# EAGLE board Keyboard_Scanner_LT2 (EAGLE 9.5.0)
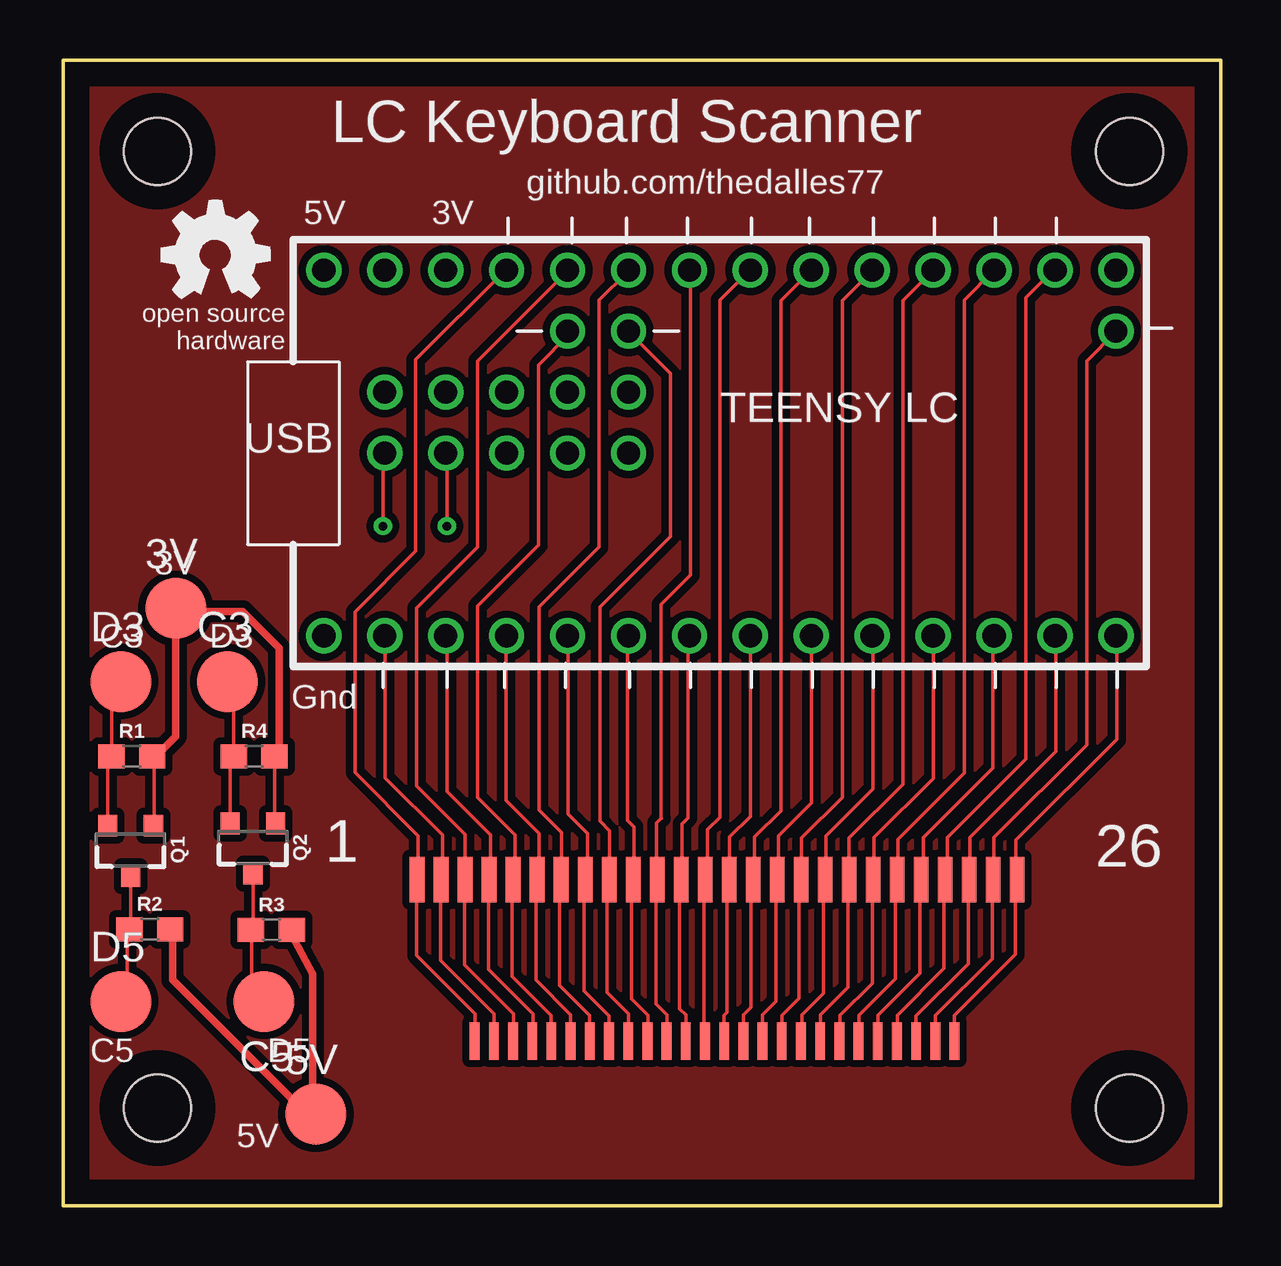
[diagram p0: board, top side]
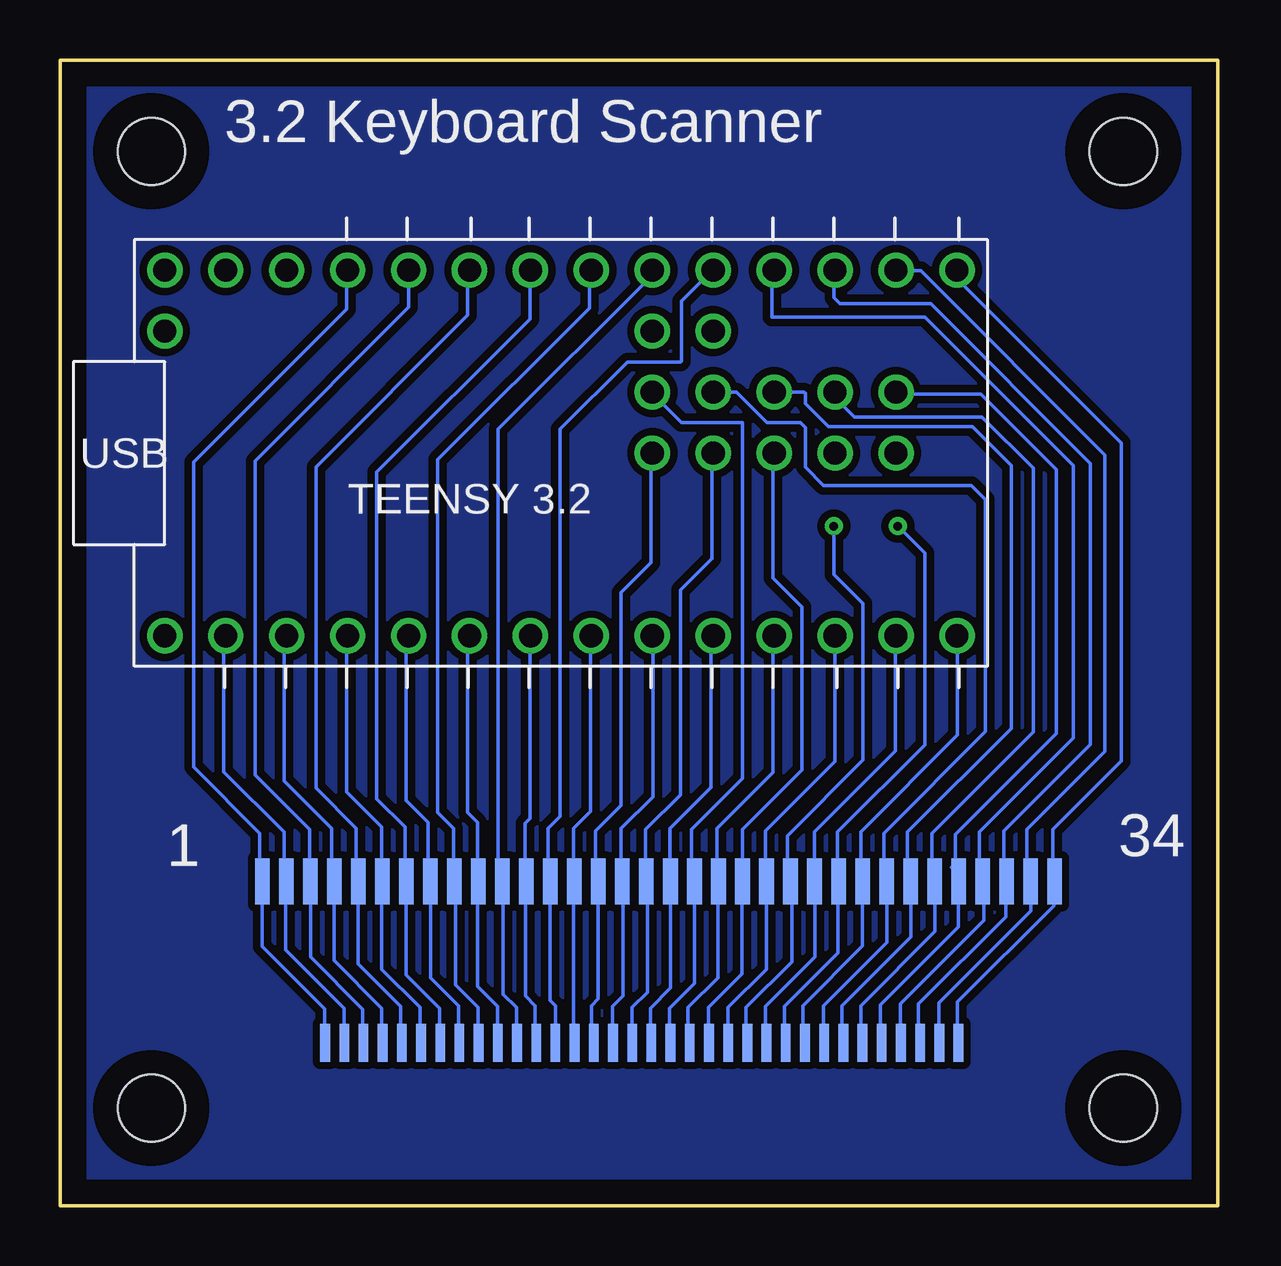
[diagram p1: board, bottom side, seen from below]

Size 48.26 x 47.75 mm. Coordinates in mm from the lower left corner, seen from the top.
Outline: 0,0 0,47.75 48.26,47.75 48.26,0 0,0
Copper layers (1*16): Top 0.035mm / dielectric 1.5mm / Bottom 0.035mm
Design rules "default": minimum track width 6mil, minimum drill 0.35mm, track to track 6mil, track to pad 6mil, pad to pad 6mil, via to via 6mil, smd to smd 6mil, copper to edge 40mil, drill to drill 6mil, minimum pad ring 10mil, minimum via ring 8mil, stop-mask expansion 4mil, vias tented up to drill 0mil, thermal gap 10mil
Holes 2.8 mm at 44.45,4.06 44.45,43.94 3.94,43.94 3.94,4.06

## Footprints (pad centres in the part's own frame; a part is rotated, then mirrored left to right if it is on the bottom)
B2,54 = smd 2.54 x 2.54: TP 0,0
TEENSY_COMBO2 = drill 0.965: 1 -11.43,7.62; 2 -13.97,7.62; 3 -16.51,7.62; 4 -6.35,5.08; 5 -3.81,5.08; 6 -3.81,2.54; 7 -6.35,2.54; 8 -8.89,2.54; 9 -11.43,2.54; 10 -13.97,2.54; 11 -13.97,0; 12 -11.43,0; 13 -8.89,0; 14 -6.35,0; 15 -3.81,0; A -16.51,-7.62; B -13.97,-7.62; C -11.43,-7.62; D -8.89,-7.62; E -6.35,-7.62; F -3.81,-7.62; G -1.27,-7.62; H 1.27,-7.62; I 3.81,-7.62; J 6.35,-7.62; K 8.89,-7.62; L 11.43,-7.62; M 13.97,-7.62; N 16.51,-7.62; O 16.51,5.08; P 16.51,7.62; Q 13.97,7.62; R 11.43,7.62; S 8.89,7.62; T 6.35,7.62; U 3.81,7.62; V 1.27,7.62; W -1.27,7.62; X -3.81,7.62; Y -6.35,7.62; Z -8.89,7.62
FPC_DUAL = smd 0.61 x 1.905: 1 11.836,3.429; 2 10.836,3.429; 3 9.835,3.429; 4 8.834,3.429; 5 7.833,3.429; 6 6.833,3.429; 7 5.832,3.429; 8 4.831,3.429; 9 3.83,3.429; 10 2.83,3.429; 11 1.829,3.429; 12 0.828,3.429; 13 -0.173,3.429; 14 -1.173,3.429; 15 -2.174,3.429; 16 -3.175,3.429; 17 -4.176,3.429; 18 -5.177,3.429; 19 -6.177,3.429; 20 -7.178,3.429; 21 -8.179,3.429; 22 -9.18,3.429; 23 -10.18,3.429; 24 -11.181,3.429; 25 -12.182,3.429; 26 -13.183,3.429 | smd 0.406 x 0.813: 27 9.22,-2.921; 28 8.42,-2.921; 29 7.62,-2.921; 30 6.82,-2.921; 31 6.02,-2.921; 32 5.22,-2.921; 33 4.42,-2.921; 34 3.619,-2.921; 35 2.819,-2.921; 36 2.019,-2.921; 37 1.219,-2.921; 38 0.419,-2.921; 39 -0.381,-2.921; 40 -1.181,-2.921; 41 -1.981,-2.921; 42 -2.781,-2.921; 43 -3.581,-2.921; 44 -4.381,-2.921; 45 -5.182,-2.921; 46 -5.982,-2.921; 47 -6.782,-2.921; 48 -7.582,-2.921; 49 -8.382,-2.921; 50 -9.182,-2.921; 51 -9.982,-2.921; 52 -10.782,-2.921; 53 -10.782,-3.683; 54 -9.982,-3.683; 55 -9.182,-3.683; 56 -8.382,-3.683; 57 -7.582,-3.683; 58 -6.782,-3.683; 59 -5.982,-3.683; 60 -5.182,-3.683; 61 -4.381,-3.683; 62 -3.581,-3.683; 63 -2.781,-3.683; 64 -1.981,-3.683; 65 -1.181,-3.683; 66 -0.381,-3.683; 67 0.419,-3.683; 68 1.219,-3.683; 69 2.019,-3.683; 70 2.819,-3.683; 71 3.619,-3.683; 72 4.42,-3.683; 73 5.22,-3.683; 74 6.02,-3.683; 75 6.82,-3.683; 76 7.62,-3.683; 77 8.42,-3.683; 78 9.22,-3.683
FPC_DUAL_FRONT = smd 0.61 x 1.905 bottom: 1 18.186,3.429; 2 17.186,3.429; 3 16.185,3.429; 4 15.184,3.429; 5 14.183,3.429; 6 13.183,3.429; 7 12.182,3.429; 8 11.181,3.429; 9 10.18,3.429; 10 9.18,3.429; 11 8.179,3.429; 12 7.178,3.429; 13 6.177,3.429; 14 5.177,3.429; 15 4.176,3.429; 16 3.175,3.429; 17 2.174,3.429; 18 1.173,3.429; 19 0.173,3.429; 20 -0.828,3.429; 21 -1.829,3.429; 22 -2.83,3.429; 23 -3.83,3.429; 24 -4.831,3.429; 25 -5.832,3.429; 26 -6.833,3.429; 79 -7.833,3.429; 80 -8.834,3.429; 81 -9.835,3.429; 82 -10.836,3.429; 83 -11.836,3.429; 84 -12.837,3.429; 85 -13.838,3.429; 86 -14.839,3.429 | smd 0.406 x 0.813 bottom: 27 15.57,-2.921; 28 14.77,-2.921; 29 13.97,-2.921; 30 13.17,-2.921; 31 12.37,-2.921; 32 11.57,-2.921; 33 10.77,-2.921; 34 9.97,-2.921; 35 9.169,-2.921; 36 8.369,-2.921; 37 7.569,-2.921; 38 6.769,-2.921; 39 5.969,-2.921; 40 5.169,-2.921; 41 4.369,-2.921; 42 3.569,-2.921; 43 2.769,-2.921; 44 1.968,-2.921; 45 1.168,-2.921; 46 0.368,-2.921; 47 -0.432,-2.921; 48 -1.232,-2.921; 49 -2.032,-2.921; 50 -2.832,-2.921; 51 -3.632,-2.921; 52 -4.432,-2.921; 53 -4.432,-3.683; 54 -3.632,-3.683; 55 -2.832,-3.683; 56 -2.032,-3.683; 57 -1.232,-3.683; 58 -0.432,-3.683; 59 0.368,-3.683; 60 1.168,-3.683; 61 1.968,-3.683; 62 2.769,-3.683; 63 3.569,-3.683; 64 4.369,-3.683; 65 5.169,-3.683; 66 5.969,-3.683; 67 6.769,-3.683; 68 7.569,-3.683; 69 8.369,-3.683; 70 9.169,-3.683; 71 9.97,-3.683; 72 10.77,-3.683; 73 11.57,-3.683; 74 12.37,-3.683; 75 13.17,-3.683; 76 13.97,-3.683; 77 14.77,-3.683; 78 15.57,-3.683; 87 -5.232,-2.921; 88 -6.032,-2.921; 89 -6.833,-2.921; 90 -7.633,-2.921; 91 -8.433,-2.921; 92 -9.233,-2.921; 93 -10.033,-2.921; 94 -10.833,-2.921; 95 -10.833,-3.683; 96 -10.033,-3.683; 97 -9.233,-3.683; 98 -8.433,-3.683; 99 -7.633,-3.683; 100 -6.833,-3.683; 101 -6.032,-3.683; 102 -5.232,-3.683
SOT23-3 = smd 0.8 x 0.9: 1 -0.95,-1; 2 0.95,-1; 3 0,1.1
0603 = smd 1.1 x 1: 1 -0.85,0; 2 0.85,0

## Placement (x,y rotation side)
3V  [B2,54]  4.7,24.89 0 top  (not fitted)
5V  [B2,54]  10.54,3.81 0 top  (not fitted)
C3  [B2,54]  6.86,21.84 0 top  (not fitted)
C5  [B2,54]  8.38,8.51 180 top  (not fitted)
D3  [B2,54]  2.41,21.84 0 top  (not fitted)
D5  [B2,54]  2.41,8.51 0 top  (not fitted)
E$1  [TEENSY_COMBO2]  27.38,31.37 0 top
E$2  [FPC_DUAL]  27.94,10.16 0 top
E$3  [FPC_DUAL_FRONT]  21.64,10.08 0 top
E$4  [OSHW_5MM]  6.35,39.62 0 top
Q1  220mA/50V/3.5Ω  [SOT23-3]  2.82,14.83 180 top
Q2  220mA/50V/3.5Ω  [SOT23-3]  7.92,14.93 180 top
R1  10k  [0603]  2.87,18.73 0 top
R2  10k  [0603]  3.62,11.52 0 top
R3  10k  [0603]  8.69,11.49 0 top
R4  10k  [0603]  7.97,18.73 0 top

## Library data of the parts
3V 5V C3 C5 D3 D5 = testpad
E$1 = Teensy_Combo2
E$2 = FPC_Dual_front
E$3 = FPC_Dual_back
E$4 = oshw
Q1 Q2 = SparkFun-DiscreteSemi; PROD_ID: TRANS-00830
R1-R4 = SparkFun-Resistors; PROD_ID: RES-00824

## Nets
CLK: Q1.2
DATA: Q2.2 R4.1
S$33: E$1.R
S$132: E$1.8
TP_CLK: Q1.3
TP_DATA: Q2.3

## Tracks (layer width: path | path; a pad name or v marks a point on that pad's centre or on a via)
3V
  Top 0.152: 8.82,18.47 8.82,15.67
CLK
  Top 0.152: Q1.2 1.87,18.63 2.03,18.98 2.03,20.7
CLK1
  Top 0.152: 2.67,9.2 2.67,11.56
CLK2
  Top 0.152: 7.86,8.82 7.86,11.18
DATA
  Top 0.152: Q2.2 6.97,18.63 R4.1 7.12,21.08
S$1
  Top 0.152: 14.73,12.72 14.73,10.44 17.17,8 17.17,7.49 17.2,7.47
S$2
  Top 0.152: 15.75,12.8 15.75,10.21 17.96,8 17.96,7.47
S$3
  Top 0.152: 16.74,12.75 16.74,10.03 18.77,8 18.77,7.49
S$4
  Top 0.152: 17.73,12.75 17.73,9.86 19.58,8 19.58,7.54
S$5
  Top 0.152: 18.72,12.75 18.72,9.55 20.34,7.92 20.34,7.54 20.32,7.52
S$6
  Top 0.152: 19.71,12.75 19.71,9.4 21.16,7.95 21.16,7.54 21.13,7.52
S$7
  Top 0.152: 20.7,12.75 20.7,9.17 21.95,7.92 21.95,7.49
S$8
  Top 0.152: 21.72,12.72 21.72,8.94 22.76,7.9 22.76,7.52 22.73,7.49
S$9
  Top 0.152: 22.68,12.85 22.68,8.89 23.57,8 23.57,7.39
S$10
  Top 0.152: 23.7,12.72 23.7,8.61 24.38,7.92 24.38,7.54
S$11
  Top 0.152: 24.71,12.72 24.71,8.41 25.17,7.95 25.17,7.52
S$12
  Top 0.152: 25.7,12.75 25.7,8.2 25.96,7.95 25.96,7.49 25.98,7.47
S$13
  Top 0.152: 26.72,12.78 26.72,7.49 26.75,7.47
S$14
  Top 0.152: 27.69,12.78 27.69,8.05 27.56,7.92 27.56,7.44
S$15
  Top 0.152: 28.68,12.75 28.68,8.26 28.37,7.95 28.37,7.57
S$16
  Top 0.152: 29.72,12.72 29.72,8.51 29.16,7.95 29.16,7.47
S$17
  Top 0.152: 30.68,12.72 30.68,8.64 29.97,7.92 29.97,7.52
S$18
  Top 0.152: 31.7,12.75 31.7,8.84 30.81,7.95 30.81,7.54 30.76,7.49
S$19
  Top 0.152: 32.72,12.75 32.72,9.09 31.57,7.95 31.57,7.54 31.55,7.52
S$20
  Top 0.152: 33.73,12.72 33.73,9.27 32.38,7.92 32.38,7.54 32.36,7.52
S$21
  Top 0.152: 34.7,12.75 34.7,9.45 33.17,7.92 33.17,7.49 33.15,7.47
S$22
  Top 0.152: 35.71,12.75 35.71,9.68 33.96,7.92 33.96,7.54 33.93,7.52
S$23
  Top 0.152: 36.73,12.72 36.73,9.88 34.77,7.92 34.77,7.49
S$24
  Top 0.152: 37.74,12.72 37.74,10.08 35.56,7.9 35.56,7.54
S$25
  Top 0.152: 38.73,12.8 38.73,10.29 36.37,7.92 36.37,7.44 36.35,7.42
S$26
  Top 0.152: 39.7,12.75 39.7,10.46 37.16,7.92 37.16,7.47
S$27
  Top 0.152: 43.92,23.7 43.92,19.43 39.73,15.24 39.73,14.3
S$28
  Top 0.152: 43.92,36.4 43.74,36.4
S$29
  Top 0.152: 43.89,36.42 42.67,35.2 42.67,19.2 38.81,15.34 38.81,14.25
S$30
  Top 0.152: 41.38,23.72 41.38,18.92 37.8,15.34 37.8,14.22 37.77,14.2
S$31
  Top 0.152: 41.33,38.91 41.2,38.91 40.13,37.85 40.13,18.62 36.85,15.34 36.85,14.45 36.8,14.4
S$32
  Top 0.152: 38.76,23.72 38.76,18.24 35.87,15.34 35.87,14.3
S$33
  Top 0.152: E$1.R 37.57,37.74 37.57,18.03 34.8,15.27 34.8,14.35 34.75,14.3
S$34
  Top 0.152: 36.27,23.72 36.27,17.8 33.81,15.34 33.81,14.4
S$35
  Top 0.152: 36.22,38.91 36.2,38.91 35,37.72 35,17.55 32.77,15.32 32.77,14.3
S$36
  Top 0.152: 33.76,23.72 33.76,17.37 31.8,15.42 31.8,14.2
S$37
  Top 0.152: 33.73,38.91 33.66,38.91
S$38
  Top 0.152: 31.85,14.3 31.8,14.25
S$39
  Top 0.152: 33.73,38.94 33.71,38.94 32.49,37.72 32.49,17.02 30.79,15.32 30.79,14.2
S$40
  Top 0.152: 31.19,23.65 31.19,16.79 29.82,15.42 29.82,14.28 29.79,14.25
S$41
  Top 0.152: 31.11,38.94 31.11,38.91 29.92,37.72 29.92,16.46 28.83,15.37 28.83,14.3
S$42
  Top 0.152: 28.65,23.67 28.65,16.23 27.79,15.37 27.79,14.3 27.76,14.28
S$43
  Top 0.152: 28.65,39.01 27.38,37.74 27.38,16.18 26.87,15.67 26.87,14.25
S$44
  Top 0.152: 26.06,23.67 26.06,16.15 25.81,15.9 25.81,14.22 25.88,14.15
S$45
  Top 0.152: 26.16,38.91 26.16,26.29 24.92,25.04 24.92,16.15 24.94,16.13 24.92,16.13 24.74,15.95 24.74,14.28 24.71,14.25
S$46
  Top 0.152: 23.52,23.72 23.52,16.05 23.8,15.77 23.8,14.25 23.75,14.2
S$47
  Top 0.152: 23.65,36.45 23.65,36.35 25.32,34.67 25.32,27.89 22.38,24.94 22.38,16.03 22.78,15.62 22.78,14.15 22.84,14.1
S$48
  Top 0.152: 21.06,23.72 21.06,16.33 21.87,15.52 21.87,14.38 21.84,14.35
S$49
  Top 0.152: 23.57,38.91 23.52,38.91 22.35,37.74 22.35,27.46 19.84,24.94 19.84,16.48 20.78,15.54 20.78,14.28
S$50
  Top 0.152: 18.47,23.65 18.47,16.89 19.84,15.52 19.84,14.28 19.81,14.25
S$51
  Top 0.152: 21.08,36.37 21.08,36.3 19.81,35.03 19.81,27.53 17.27,24.99 17.27,17.02 18.85,15.44 18.85,14.22 18.8,14.17
S$52
  Top 0.152: 16,23.75 16,17.27 17.83,15.44 17.83,14.28
S$53
  Top 0.152: 21.06,38.94 21.01,38.94 17.27,35.2 17.27,27.46 14.73,24.92 14.73,17.5 16.76,15.47 16.76,14.38 16.74,14.35
S$54
  Top 0.152: 13.44,23.77 13.44,17.83 15.82,15.44 15.82,14.3 15.8,14.28
S$55
  Top 0.152: 18.44,38.91 18.36,38.91 14.71,35.26 14.71,27.28 12.17,24.74 12.17,18.06 14.81,15.42 14.81,14.3 14.78,14.28
S$56
  Bottom 0.152: 39.83,12.57 39.83,10.79 37.24,8.2 37.24,7.42
S$57
  Bottom 0.152: 38.86,12.68 38.86,10.67 36.42,8.23 36.42,7.44 | 36.42,7.44 36.4,7.42 | 36.42,7.44 36.45,7.47
S$58
  Bottom 0.152: 37.82,12.68 37.82,10.36 35.64,8.18 35.64,7.39 35.66,7.42
S$59
  Bottom 0.152: 36.83,12.72 36.83,10.21 34.85,8.23 34.85,7.44 34.87,7.42
S$60
  Bottom 0.152: 35.84,12.68 35.84,10.08 34.06,8.31 34.06,7.37
S$61
  Bottom 0.152: 34.85,12.65 34.85,9.86 33.25,8.26 33.25,7.32 33.25,7.29
S$62
  Bottom 0.152: 33.83,12.68 33.83,9.63 32.44,8.23 32.44,7.34
S$63
  Bottom 0.152: 32.82,12.68 32.82,9.5 31.65,8.33 31.65,7.34
S$64
  Bottom 0.152: 31.77,12.7 31.77,9.2 30.84,8.26 30.84,7.37
S$65
  Bottom 0.152: 30.86,12.65 30.86,9.14 30.02,8.31 30.02,7.39 30.05,7.37 30.07,7.39
S$66
  Bottom 0.152: 29.79,12.65 29.79,8.81 29.23,8.26 29.23,7.39
S$67
  Bottom 0.152: 28.85,12.7 28.85,8.74 28.45,8.33 28.45,7.44 28.47,7.42
S$68
  Bottom 0.152: 27.84,12.72 27.84,8.56 27.61,8.33 27.61,7.34
S$69
  Bottom 0.152: 26.85,12.68 26.85,7.34 26.82,7.32
S$70
  Bottom 0.152: 25.83,12.7 25.83,8.61 26.11,8.33 26.11,7.37
S$71
  Bottom 0.152: 24.79,12.7 24.79,8.74 25.22,8.31 25.22,7.39
S$72
  Bottom 0.152: 23.77,12.68 23.77,8.89 24.41,8.26 24.41,7.42 24.49,7.34
S$73
  Bottom 0.152: 22.81,12.7 22.81,9.07 23.65,8.23 23.65,7.42
S$74
  Bottom 0.152: 21.82,12.65 21.82,9.27 22.86,8.23 22.86,7.32 22.89,7.29
S$75
  Bottom 0.152: 20.83,12.65 20.83,9.5 22.07,8.26 22.07,7.26 22.1,7.24
S$76
  Bottom 0.152: 19.84,12.7 19.84,9.65 21.23,8.26 21.23,7.44 21.29,7.39
S$77
  Bottom 0.152: 18.82,12.68 18.82,9.86 20.42,8.26 20.42,7.44 20.47,7.39
S$78
  Bottom 0.152: 17.75,12.65 17.75,10.16 19.66,8.26 19.66,7.34
S$79
  Bottom 0.152: 16.79,12.68 16.79,10.36 18.85,8.31 18.85,7.34 18.92,7.26
S$80
  Bottom 0.152: 15.82,12.65 15.82,10.54 18.06,8.31 18.06,7.37 18.09,7.34
S$81
  Bottom 0.152: 14.81,12.65 14.81,10.82 17.3,8.33 17.3,7.34 17.35,7.29
S$82
  Bottom 0.152: 13.79,12.68 13.79,10.97 16.43,8.33 16.43,7.44
S$83
  Bottom 0.152: 12.8,12.72 12.8,11.2 15.67,8.33 15.67,7.34
S$84
  Bottom 0.152: 11.79,12.7 11.79,11.43 14.88,8.33 14.88,7.39 14.94,7.34
S$85
  Bottom 0.152: 10.82,12.62 10.82,11.61 14.07,8.36 14.07,7.29 14.1,7.26
S$86
  Bottom 0.152: 9.75,12.62 9.75,11.89 13.23,8.41 13.23,7.37 13.26,7.34
S$87
  Bottom 0.152: 8.84,12.62 8.84,12.04 12.47,8.41 12.47,7.34
S$88
  Bottom 0.152: 7.8,12.65 7.8,12.29 11.63,8.46 11.63,7.32 11.68,7.26
S$89
  Bottom 0.152: 6.83,12.72 6.83,12.5 10.85,8.48 10.85,7.37 10.87,7.34
S$90
  Bottom 0.152: 36.32,38.91 36.32,37.36 42.7,30.99 42.7,18.29 39.93,15.52 39.93,13.99 39.88,13.95
S$91
  Bottom 0.152: 41.43,23.7 41.43,18.09 38.91,15.57 38.91,14.25 38.86,14.2
S$92
  Bottom 0.152: 33.73,38.91 33.73,37.44 40.13,31.04 40.13,17.96 37.85,15.67 37.85,14.3
S$93
  Bottom 0.152: 38.91,23.7 38.91,17.7 36.93,15.72 36.93,14.1
S$94
  Bottom 0.152: 31.27,38.96 31.27,37.11 37.59,30.79 37.59,17.4 35.92,15.72 35.92,14.15 36.02,14.05
S$95
  Bottom 0.152: 36.32,23.85 36.32,17.25 34.85,15.77 34.85,14.2 34.9,14.15
S$96
  Bottom 0.152: 28.68,38.91 28.68,36.96 35.05,30.58 35.05,16.94 33.88,15.77 33.88,14.4 33.98,14.3
S$97
  Bottom 0.152: 33.83,23.7 33.83,16.89 32.92,15.98 32.92,14.1 32.97,14.05
S$98
  Bottom 0.152: 26.19,38.91 26.19,37.41 32.51,31.09 32.51,16.38 31.85,15.72 31.85,14.1
S$99
  Bottom 0.152: 31.27,23.7 31.27,16.38 30.86,15.98 30.86,14.1
S$100
  Bottom 0.152: 23.65,38.96 23.65,38.71 30,32.36 30,14.15 30.05,14.1
S$101
  Bottom 0.152: 28.68,23.65 28.68,16.13 28.88,15.93 28.88,14.15
S$102
  Bottom 0.152: 21.03,38.96 21.08,38.96 22.35,37.69 22.35,35.2 22.4,35.15 24.61,35.15 27.41,32.36 27.41,16.23 27.91,15.72 27.91,14.1 27.96,14.05
S$103
  Bottom 0.152: 26.14,23.65 26.14,16.43 26.85,15.72 26.85,14.1
S$104
  Bottom 0.152: 23.62,28.75 23.62,26.8 24.87,25.55 24.87,16.69 25.93,15.62 25.93,14.05
S$105
  Bottom 0.152: 23.55,23.65 23.55,17.04 24.87,15.72 24.87,14.15 24.97,14.05
S$106
  Bottom 0.152: 21.08,28.85 21.08,26.98 22.4,25.65 22.4,17.12 23.85,15.67 23.85,14.05
S$107
  Bottom 0.152: 21.13,23.65 21.13,17.42 22.84,15.72 22.84,14.15
S$108
  Bottom 0.152: 21.08,28.83 21.08,31.24
S$109
  Bottom 0.152: 18.54,23.7 18.54,18.06 20.88,15.72 20.88,14.2
S$110
  Bottom 0.152: 19.86,14.15 19.81,14.2 19.81,15.67 17.32,18.16 17.32,24.94 18.54,26.16 18.54,31.37
S$111
  Bottom 0.152: 15.95,23.65 15.95,18.52 18.85,15.62 18.85,13.99
S$112
  Bottom 0.152: 16,26.31 14.78,25.09 14.78,18.57 17.93,15.42 17.93,13.95 17.98,13.89
S$113
  Bottom 0.152: 13.44,23.65 13.44,18.95 16.82,15.57 16.82,13.89
S$114
  Bottom 0.152: 13.34,28.32 12.22,27.2 12.22,19.2 15.85,15.57 15.85,14.05
S$115
  Bottom 0.152: 10.85,23.65 10.85,19.61 14.88,15.57 14.88,14.25 14.83,14.2
S$116
  Bottom 0.152: 16.43,30.02 10.26,30.02 9.68,29.44 9.68,19.76 13.92,15.52 13.92,14.2 13.97,14.15
S$118
  Bottom 0.152: 16,33.83 16,33.73 15.14,32.87 9.83,32.87 7.7,30.73 7.7,19.74 11.91,15.52 11.91,14.05 11.96,14.05 12.01,14.1
S$119
  Bottom 0.152: 13.34,33.83 9.88,33.83 6.73,30.68 6.73,19.68 10.95,15.47 10.95,14.25 11.1,14.1
S$120
  Bottom 0.152: 18.59,38.96 18.59,37.03 12.22,37.03 6.02,30.84 6.02,19.48 9.93,15.57 9.93,14.1 9.98,14.05 9.98,14.1
S$121
  Bottom 0.152: 16,38.91 16,37.85 15.75,37.59 11.96,37.59 5.31,30.94 5.31,19.23 8.91,15.62 8.91,14.25 8.97,14.2
S$122
  Bottom 0.152: 13.44,38.96 12.37,38.96 4.7,31.29 4.7,18.92 7.95,15.67 7.95,14.2 8,14.15
S$123
  Bottom 0.152: 10.95,38.96 10.95,38.71 4.01,31.77 4.01,18.54 6.88,15.67 6.88,14.1 6.93,14.05
S$124
  pour Top (isolate 0.305): 0,0 0,47.75 48.26,47.75 48.26,0
S$125
  pour Bottom (isolate 0.305): 0,0 0,47.75 48.26,47.75 48.26,0
S$128
  Top 0.305: 9.65,11.05 10.41,9.65 10.41,4.83
S$129
  Top 0.305: 9.65,4.32 4.57,9.4 4.57,11.18
S$130
  Top 0.305: 9.02,19.05 9.02,23.24 7.49,24.77 5.59,24.77
S$131
  Top 0.305: 4.7,23.88 4.7,19.56 4.06,18.92
S$132
  Bottom 0.152: E$1.8 17.25,33.91 17.2,33.86 17.2,33.43 16.23,32.46 10.24,32.46 8.61,30.84 8.61,19.89 12.93,15.57 12.93,14.15
S$133
  Top 0.152: 3.81,16.13 3.81,18.41
S$134
  Bottom 0.152: 21.08,33.91 20.07,33.91 18.8,32.64 17.4,32.64 17.2,32.44 17.2,30.79 16.43,30.02
S$135
  Bottom 0.152: 23.62,33.91 22.35,32.64 19.81,32.64 19.81,30.58 19.81,30.35 19.81,17.8 21.95,15.67 21.95,14.1 22,14.05
S$136
  Bottom 0.152: 23.62,28.7 23.62,31.37
S$137
  Bottom 0.152: 16,26.31 16,28.22
S$138  (via drill 0.35)
  Top 0.152: v16,28.32 16,31.37
S$139  (via drill 0.35)
  Top 0.152: v13.34,28.32 13.34,31.37
TP_CLK
  Top 0.152: Q1.3 2.82,11.85
TP_DATA
  Top 0.152: Q2.3 7.92,11.79

## Text on the board
tPlace: LC Keyboard Scanner | github.com/thedalles77 | 5V | 3V | 3V | C3 | D3 | Gnd | 1 | 26 | C5 | D5 | 5V
bPlace: 3.2 Keyboard Scanner | 34 | 1